# Altium PCB pcb.PcbDoc
Units mil, origin at the board's own origin, x right, y up, seen from the top; angles counter-clockwise.
Board outline 2165 x 2075 mil, 2 copper layers (Top Layer, Bottom Layer); 12 components, 10 nets, 37 pads, 0 vias.
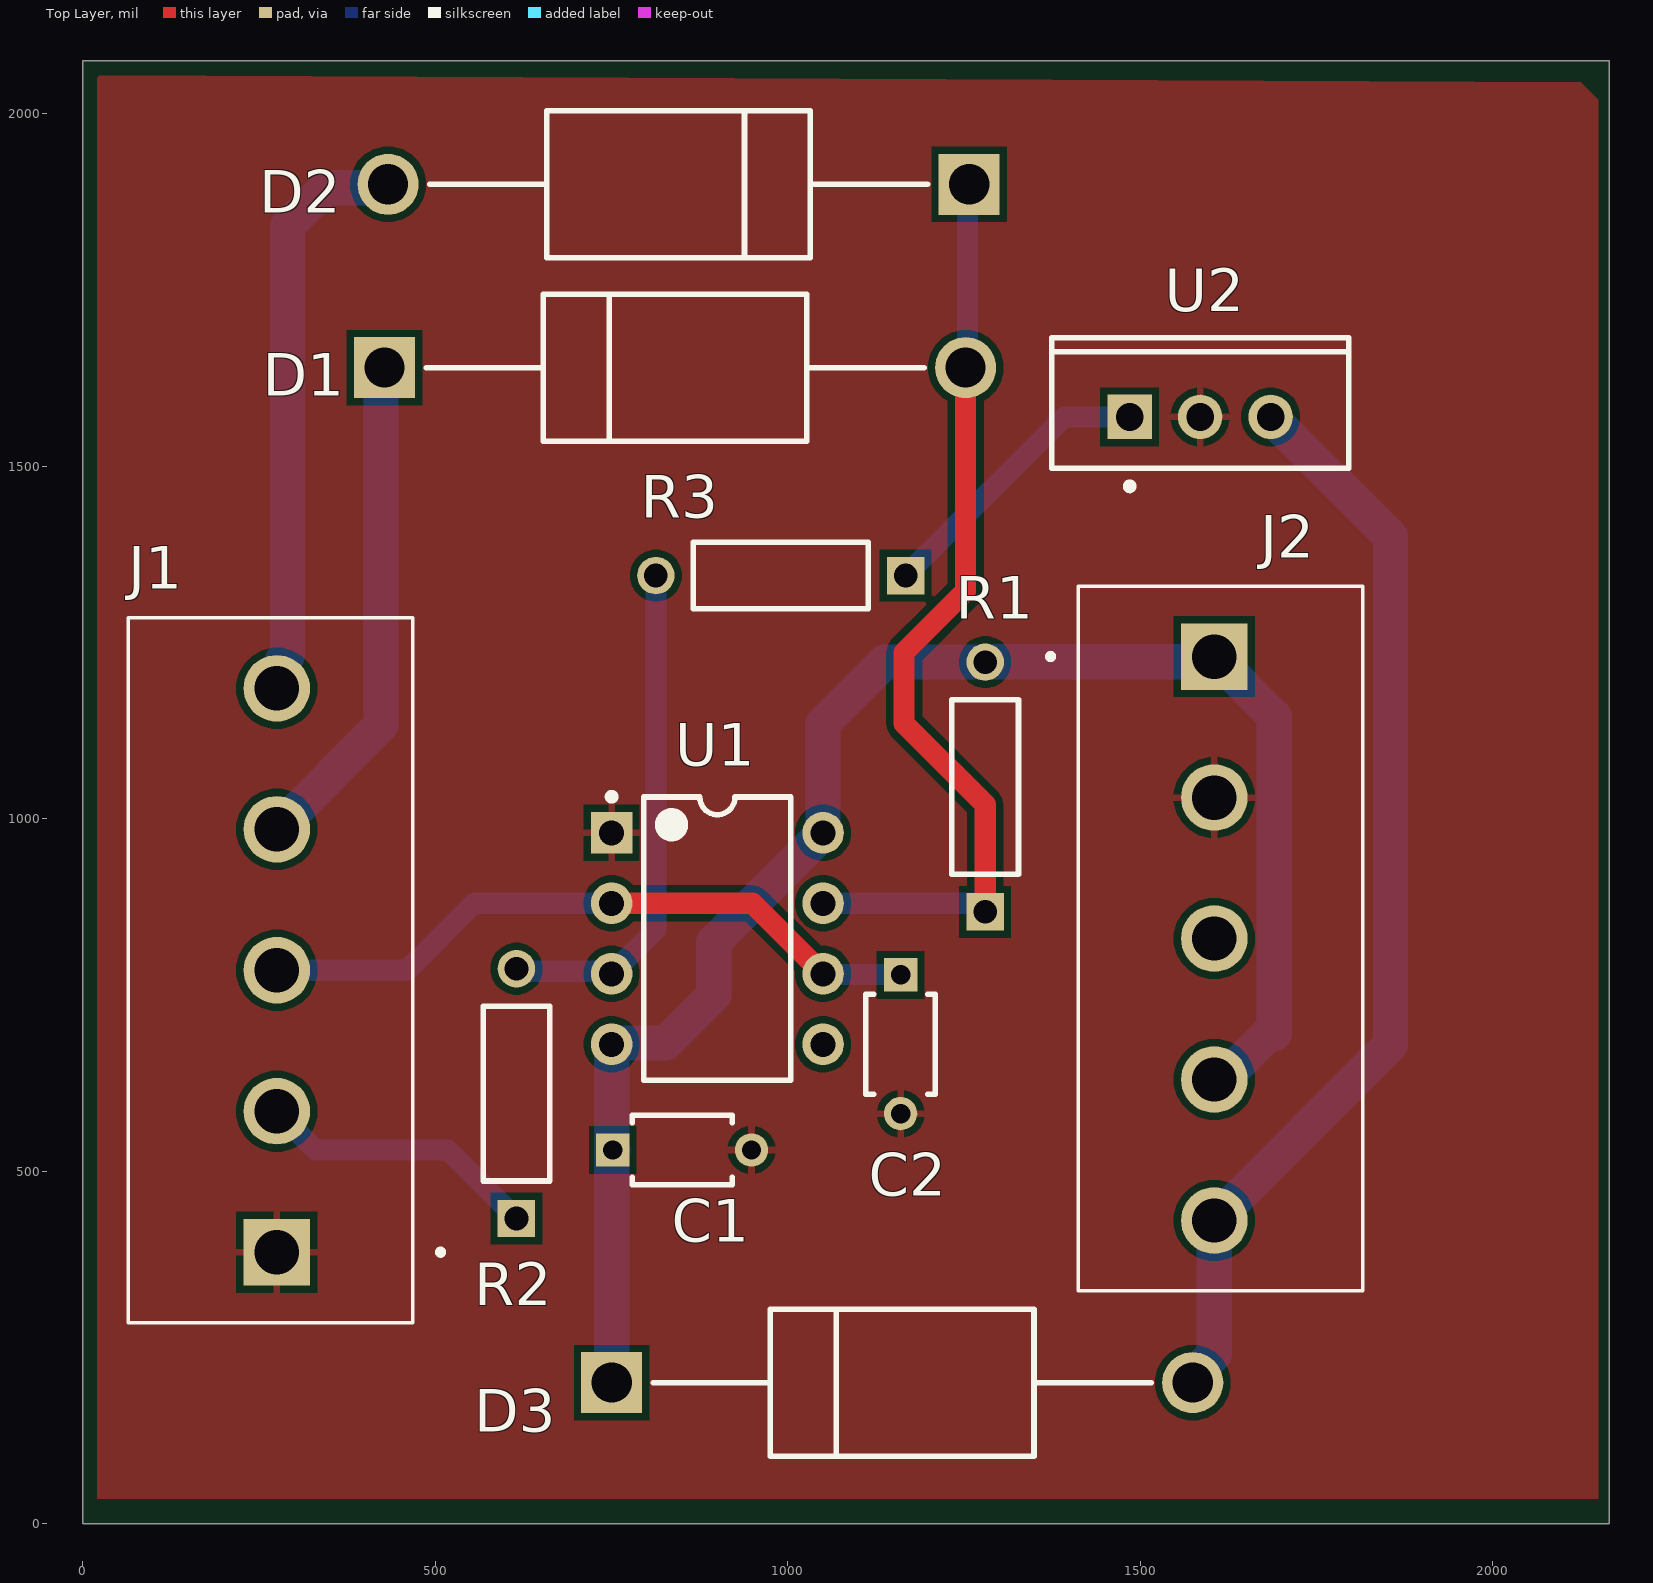
[diagram p0: Top Layer view]
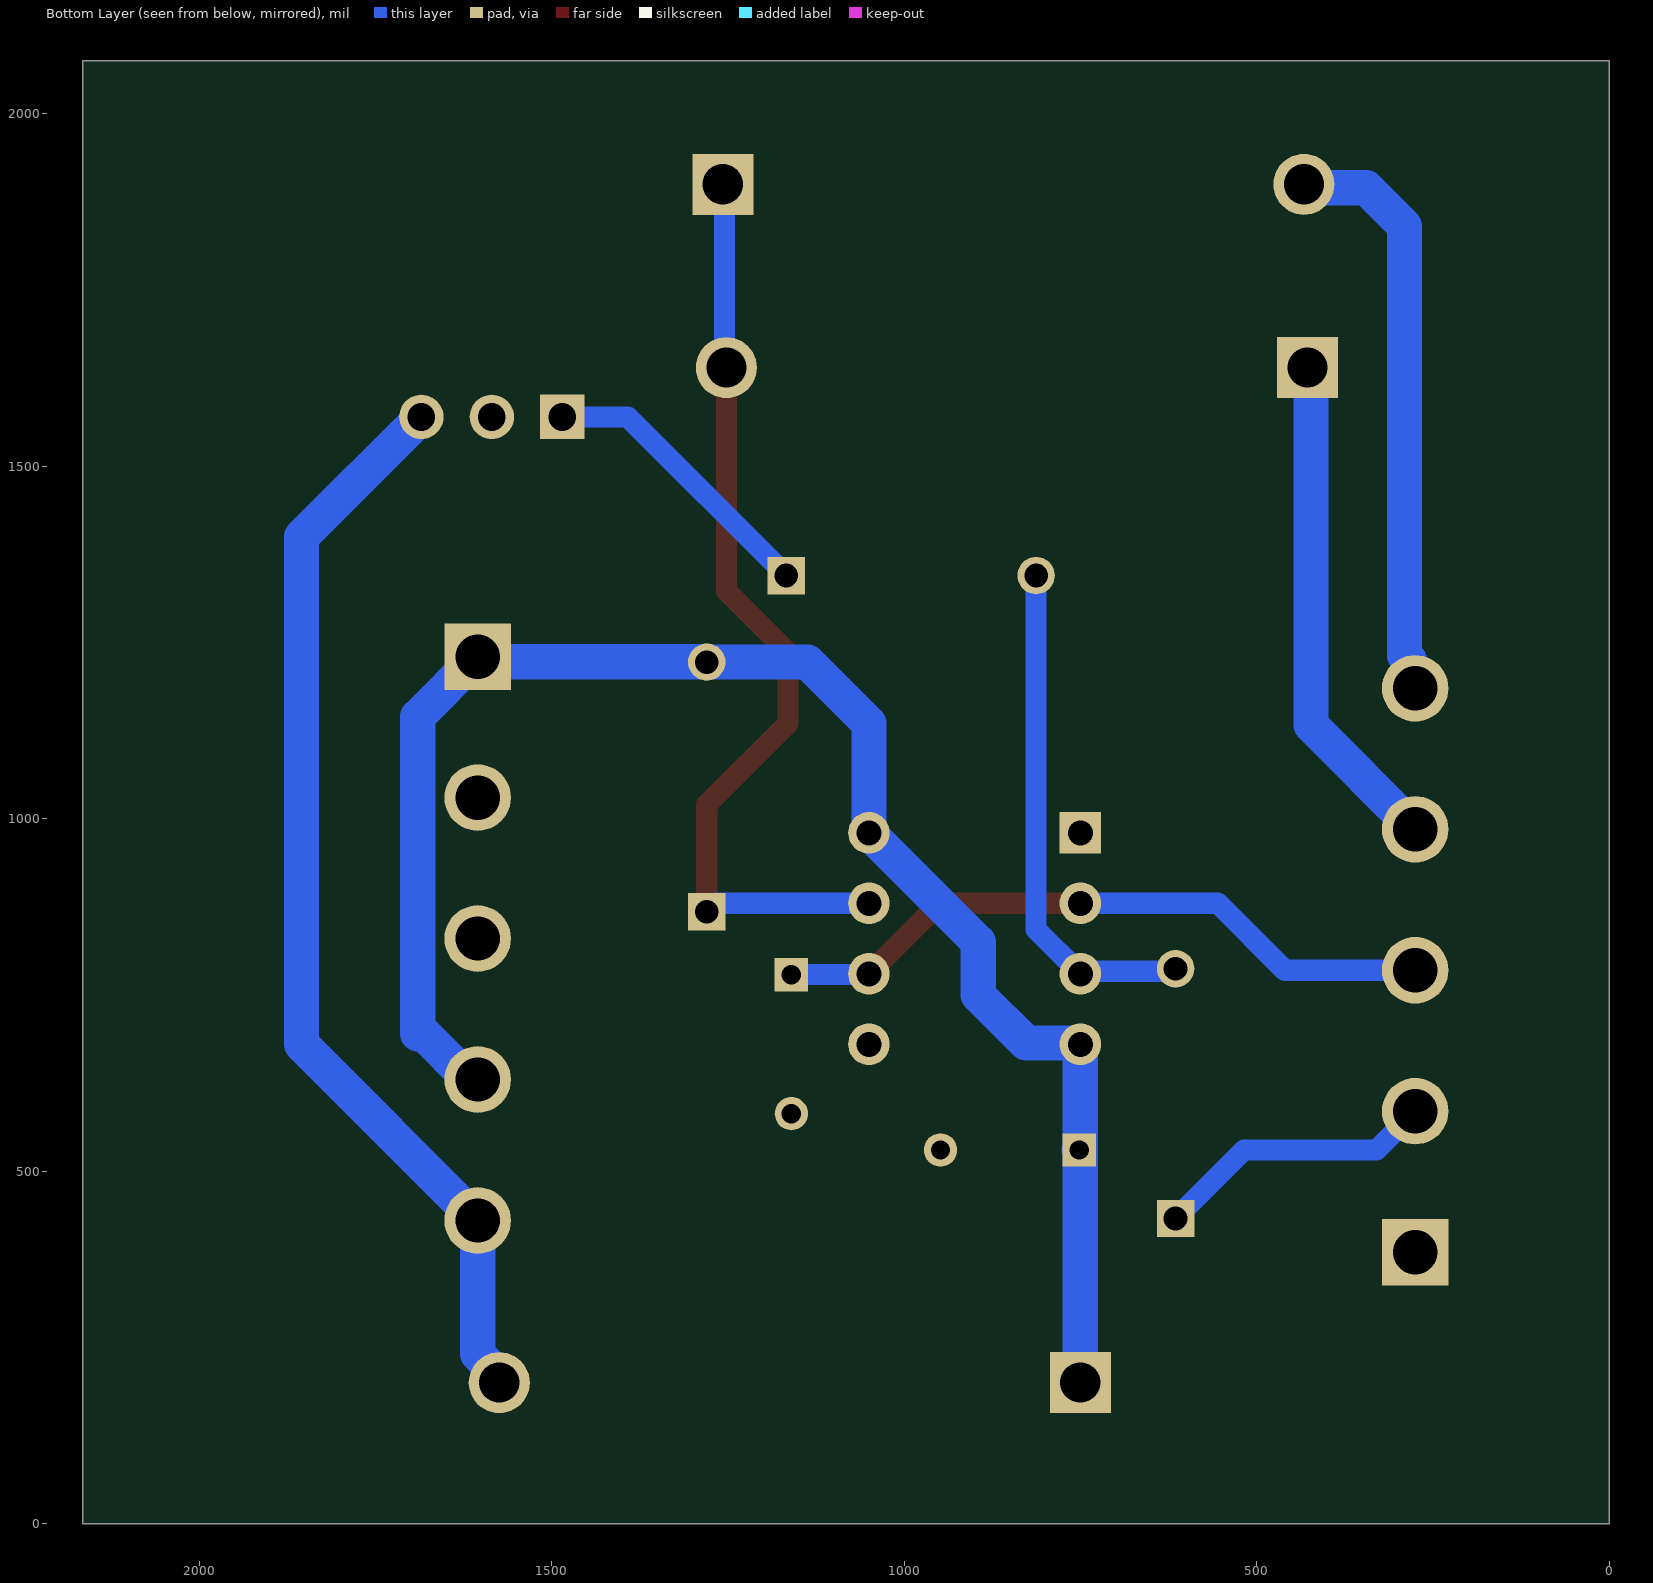
[diagram p1: Bottom Layer view, seen from below]

## Layer stack, top to bottom
Top Solder: solder mask 0.4, Solder Resist, Dk 3.5
Top Layer: signal copper 1.4
Dielectric 1: dielectric 12.6, FR-4, Dk 4.8
Bottom Layer: signal copper 1.4
Bottom Solder: solder mask 0.4, Solder Resist, Dk 3.5

## Board outline
0,0 2165,0 2165,2075 0,2075

## Design rules (kind name [scope] priority, off if disabled: settings)
BoardOutlineClearance [All] p1: gap=7.87 ignorepadtopadclearanceinfootprint=FALSE except(15.75: Arc-SplitBarrior Arc-SplitContinuation Track-SplitBarrior Track-SplitContinuation SMDPad-SplitBarrior SMDPad-SplitContinuation THPad-SplitBarrior THPad-SplitContinuation Via-SplitBarrior Via-SplitContinuation Fill-SplitBarrior Fill-SplitContinuation Poly-SplitBarrior Poly-SplitContinuation Region-SplitBarrior Region-SplitContinuation Text-SplitBarrior Text-SplitContinuation)
Clearance "Clearance Bottom Layer" [OnLayer('Bottom Layer')] p1: gap=8 ignorepadtopadclearanceinfootprint=TRUE except(10: Arc-Text Track-Text SMDPad-Text THPad-Text Via-Text Fill-Text Poly-Text Region-Text Text-Text)
Clearance "Clearance Top Layer" [OnLayer('Top Layer')] p2: gap=8 ignorepadtopadclearanceinfootprint=TRUE except(10: Arc-Text Track-Text SMDPad-Text THPad-Text Via-Text Fill-Text Poly-Text Region-Text Text-Text)
Clearance [All] p3: gap=7.87 ignorepadtopadclearanceinfootprint=FALSE except(3.5: Arc-Arc Arc-Track Arc-SMDPad Track-Track Track-SMDPad SMDPad-SMDPad; 5: Arc-Via Track-Via SMDPad-Via THPad-Via Via-Via; 10: Arc-Text Track-Text SMDPad-Text THPad-Text Via-Text Fill-Text Poly-Text Region-Text Text-Text)
HoleSize [All] p1: absolutevalues=TRUE maxlimit=248.03 minlimit=7.87 maxpercent=80.000 minpercent=20.000
MinimumAnnularRing [All] p1: minimumring=3
MinimumSolderMaskSliver [All] p1: minsoldermaskwidth=3.94
PolygonConnect PolygonConnect_1 [All] p1: thpad.connectstyle=Relief thpad.reliefconductorwidth=20 thpad.reliefentries=4 thpad.polygonreliefangle="90 Angle" thpad.airgapwidth=10 smdpad.connectstyle=Relief smdpad.reliefconductorwidth=20 smdpad.reliefentries=4 smdpad.polygonreliefangle="90 Angle" smdpad.airgapwidth=10 via.connectstyle=Direct via.reliefconductorwidth=20 via.reliefentries=4 via.polygonreliefangle="90 Angle" via.airgapwidth=10
RoutingCorners [All] p1: cornerstyle=Round minsetback=100 maxsetback=100
RoutingVias [All] p1: holewidth=19.68 width=39.37 viastyle="Through Hole" minholewidth=7.87 minwidth=17.72 maxholewidth=39.37 maxwidth=78.74
SilkToSilkClearance [All] p1: silktosilkclearance=3.94
SilkToSolderMaskClearance [IsPad] p1: minsilkscreentomaskgap=3.94 clearancetoexposedcopper=TRUE
SolderMaskExpansion [All] p1: expansion=4 istentingtop=FALSE
Width [All] p1: maxlimit=100 minlimit=15 preferedwidth=30 minimp=50.000000 maximp=50.000000 favimp=50.000000
25 further rules are at their usual default settings.

## Components (designator, comment, footprint, x,y, rotation, side; value= is the part's Value field where it differs from the comment)
C1 "RCER71H103K0K1H03B" FP-RCE0K1-MFG 850,530 r0 top
C2 "RCER71H103K0K1H03B" FP-RCE0K1-MFG 1160,680 r270 top
D1 "1N5408G-T" FP-DO-201AD-MFG 840,1640 r0 top
D2 "1N5408G-T" FP-DO-201AD-MFG 845,1900 r180 top
D3 "1N5408G-T" FP-DO-201AD-MFG 1162.2,200 r0 top
J1 "TB007-508-05BE" CUI_TB007-508-05BE 275,385 r90 top
J2 "TB007-508-05BE" CUI_TB007-508-05BE 1605,1230 r270 top
R1 "MFR-25FBF52-1K" RESA60-630X240 1280,1045 r90 top
R2 "MFR-25FBF52-1K" RESA60-630X240 615,610 r90 top
R3 "MFR-25FBF52-1K" RESA60-630X240 990,1345 r180 top
U1 "NE555P" P0008A 900,830 r0 top
U2 "LM395T/NOPB" NDE0003A 1585,1570 r0 top

## Footprints (in the part's own frame and the unit in brackets; to place one, negate y for a bottom-side part, rotate by r counter-clockwise, add the part's x,y. Pads: shape width x height; smd on the part's side, far side on the other; paste and mask are expansions set on the pad)
CUI_TB007-508-05BE [mm]
  rect 2.4x2.4 hole 1.6: 1(0,0)
  round 2.4 hole 1.6: 2(5.08,0) 3(10.16,0) 4(15.24,0) 5(20.32,0)
  silkscreen extent -2.54,-6 22.86,5.35
FP-DO-201AD-MFG [mm]
  rect 2.2x2.2 hole 1.45 paste-1000 mask+0: 1(-10.47,0)
  round 2.2 hole 1.45 paste-1000 mask+0: 2(10.47,0)
  silkscreen extent -8.97,-2.65 8.97,2.65, body extent -11.67,-2.75 11.67,2.75, height 0.25
FP-RCE0K1-MFG [mm]
  rect 1.2x1.2 hole 0.7 paste-1000 mask+0: 1(-2.5,0)
  round 1.2 hole 0.7 paste-1000 mask+0: 2(2.5,0)
  silkscreen extent -1.8,-1.25 1.8,1.25, body extent -3.2,-1.35 3.2,1.35, height 0.25
NDE0003A [mm] "FM, 3-Leads, Body 10.7x4.7mm, Pitch 2.54mm"
  rect 1.6x1.6 hole 1: 1(-2.54,0)
  round 1.6 hole 1: 2(0,0) 3(2.54,0)
  silkscreen extent -5.35,-2.62 5.35,2.85, body extent -5.4,-1.9 5.4,2.9, height 19.4
P0008A [mm] "DIP, 8-Leads, Body 10.15x6.6mm, Pitch 2.54mm"
  rect 1.5x1.5 hole 0.9: 1(-3.81,3.81)
  round 1.5 hole 0.9: 2(-3.81,1.27) 3(-3.81,-1.27) 4(-3.81,-3.81) 5(3.81,-3.81) 6(3.81,-1.27) 7(3.81,1.27) 8(3.81,3.81)
  silkscreen extent -3.93,-5.1 2.65,5.23, body extent -3.95,-5.07 3.95,5.07, height 5.08
RESA60-630X240 [mm] "Axial Resistor, 2-Leads, Dia 2.4mm, Body Length 6.3mm"
  rect 1.35x1.35 hole 0.85: 1(-4.5,0)
  round 1.35 hole 0.85: 2(4.5,0)
  silkscreen extent -3.15,-1.2 3.15,1.2, body extent -3.15,-1.2 3.15,1.2, height 2.4

## Part data
C1 C2: library part CMP-06035-044411-1, "Cap Ceramic 10nF 50V X7R ±10% Radial 5mm +125°C Automotive Bulk", Capacitance=10nF, Case/Package=Radial, Dielectric=X7R, Max Operating Temperature=125°C, Min Operating Temperature=-55°C, Package Quantity=500, Ratings=AEC-Q200, Resistor Type=Ceramic, Tolerance=10%, Voltage Rating=50V, Height=3.5mm, Height - Seated (Max)=0.138inch, Lead Diameter=0.5mm, Lead Free="Lead Free", Lead Pitch=0.197inch, Lead/Base Style="Formed Leads", Length=0.142inch, Mount="Through Hole", Packaging=Bulk, Termination=Radial, Voltage Rating (DC)=50V, Width=0.098inch
D1 D2 D3: library part CMP-12791-000058-1, "DIODE GEN PURP 1KV 3A DO201AD", Average Rectified Current=3A, Capacitance=40pF, Case/Package=DO-201AD, Forward Voltage=1.1V, Max Operating Temperature=150°C, Max Repetitive Reverse Voltage (Vrrm)=1kV, Max Reverse Current=5uA, Max Surge Current=125A, Min Operating Temperature=-65°C, Package Quantity=1200, Current Rating=3A, Element Configuration=Single, Forward Current=3A, Height=5.3mm, Lead Free="Lead Free", Length=9.5mm, Max Reverse Voltage (DC)=1kV, Mount="Through Hole", Number of Pins=2, Output Current=3A, Packaging="Tape and Reel", Peak Non-Repetitive Surge Current=125A, Polarity=Standard, Radiation Hardening=No, Recovery Time=2us, Reverse Recovery Time=2us, Reverse Voltage (DC)=1kV, RoHS Compliant=Yes, Series=-, Voltage Rating (DC)=1kV, Weight=0.038801oz, Width=5.3mm
J1 J2: Package=None, Availability=Unavailable, MP=TB007-508-05BE, Price=None
R1 R2 R3: library part CMP-1659-00075-1, "Axial Resistor, 1 KOhm, +/- 1%, 250 mW, -55 to 155 degC, 2-Pin THD, RoHS, Bulk", Case\Package=Axial, Max Operating Temperature="155 degC", Min Operating Temperature="-55 degC", Package Quantity=200, Power Rating="250 mW", Resistance="10 kohm", Tolerance=1%, Voltage Rating="250 V", ComponentLink1Description="Manufacturer URL", ComponentLink1URL=http://www.yageo.com/, ComponentLink2Description=Datasheet, ComponentLink2URL=http://www.yageo.com/documents/recent/Yageo%20LR_MFR_2013.pdf, DatasheetVersion=Apr-13, Length="0.248 inch", PackageDescription="2-Pin Axial Lead, Dia 2.4 mm, Body Length 6.3 mm", PackageReference=MFR-25, Packaging=Bulk, RoHSCompliant=true
U1: library part CMP-2000-04954-1, "Precision Timer, 4.5 to 16 V, 0 to 70 degC, 8-Pin DIP, Pb-Free, Tube", Manufacturer=TexasInstruments, Maximum High Level Output Current=-200mA, Maximum Low Level Output Current=200mA, Operating Supply Voltage=5, Package=8PDIP, Package Description="8-Pin Double In-line Package, Body 9.59 x 6.35 mm, Pitch 2.54 mm", Package Reference=P8, Category=Timer, Datasheet URL=http://www.ti.com/general/docs/lit/getliterature.tsp?genericPartNumber=NE555&fileType=pdf, Datasheet Version="Rev. I, 09/2014", Manufacturer URL=http://www.ti.com/, Number of Internal Timers=1, Package URL=http://www.ti.com/lit/ml/mpdi001b/mpdi001b.pdf, Packaging=Rail/Tube, Rad Hard=No, Type=Standard
U2: library part CMP-0063-01416-3, "Ultra Reliable Power Transistor, 3-pin TO-220, Pb-Free", Manufacturer="Texas Instruments", PackageTopMarking=NSUZXYTTE#*LM395T, PowerWise=N, ComponentLink1Description="Datasheet URL", ComponentLink1URL=http://www.ti.com/general/docs/lit/getliterature.tsp?genericPartNumber=LM395&fileType=pdf, CompType=MiscPower, PackageDescription="TO-220, Molded, 3 Lead, Straight", PackageReference=NDE0003A, PinCount=3, RoHS=Y

## Nets (pads, with @x,y where several pads share a name; then routed paths per layer and width w, separated by ;. In a path a pad name is that pad's centre, name@x,y a point inside that pad or via, vN(x,y) a via of type N, cw(c..) or ccw(c..) an arc to the next point about the centre after c; other vN are vias at no path point)
GND: C1.2 C2.2 J1.1 J2.2 U1.1 U2.2
LED_IN: J1.2 R2.1 | length 403
  Bottom Layer w30: J1.2 330,530 517.83,530 R2.1
NetC2_1: C2.1 J1.3 U1.2 U1.6 | length 966.4
  Top Layer w30: U1.2 950,880 U1.6
  Bottom Layer w30: J1.3 460,785 555,880 U1.2 ; U1.6 1050.79,779.21 1159.21,779.21 C2.1
NetD1_1: D1.1 J1.4 | length 711.2
  Bottom Layer w50: J1.4 422.8,1132.8 D1.1@422.8,1635
NetD1_2: D1.2 D2.1 R1.1 U1.7 | length 1353
  Top Layer w30: D1.2 1252.2,1322.8 1165,1235.59 1165,1135 1280,1020 R1.1
  Bottom Layer w30: U1.7 1267.83,880 R1.1 ; D1.2 1254.7,1642.5 1254.7,1897.5 D2.1
NetD2_2: D2.2 J1.5 | length 817.2
  Bottom Layer w50: J1.5 283.51,1193.51 283.51,1224.97 290,1231.46 290,1840.71 344.29,1895 D2.2@422.8,1895
NetD3_2: D3.2 J2.5 U2.3 | length 1556.6
  Bottom Layer w50: D3.2 1574.41,209.91 1605,240.5 J2.5 1855,680 1855,1400 U2.3
NetR2_2: R2.2 R3.2 U1.3 | length 729.5
  Bottom Layer w30: R2.2@615.33,787.5 R2.2 618.58,783.58 746.42,783.58 U1.3 812.83,842.83 R3.2
NetR3_1: R3.1 U2.1 | length 411
  Bottom Layer w30: R3.1 1392.17,1570 U2.1
VCC: C1.1 D3.1 J2.1 J2.4 R1.2 U1.4 U1.8 | length 2381
  Bottom Layer w50: D3.1 750,528.43 C1.1 750,531.57 U1.4 751.73,681.73 826.73,681.73 895,750 895,825 U1.8 1050,1135 1137.17,1222.17 R1.2 1280.6,1222.77 1597.77,1222.77 J2.1 1690,1145 1690,695 1682.04,695 1617.04,630 J2.4
pads on no net: J2.3 U1.5

## Polygon pours and split planes (outlines as drawn)
GND on Top Layer "GND_L01_P001" (solid, pour order 1): 20,2055 20,35 2150,35 2150,2020 2125,2045